# EAGLE board followLineMain (EAGLE 7.7.0)
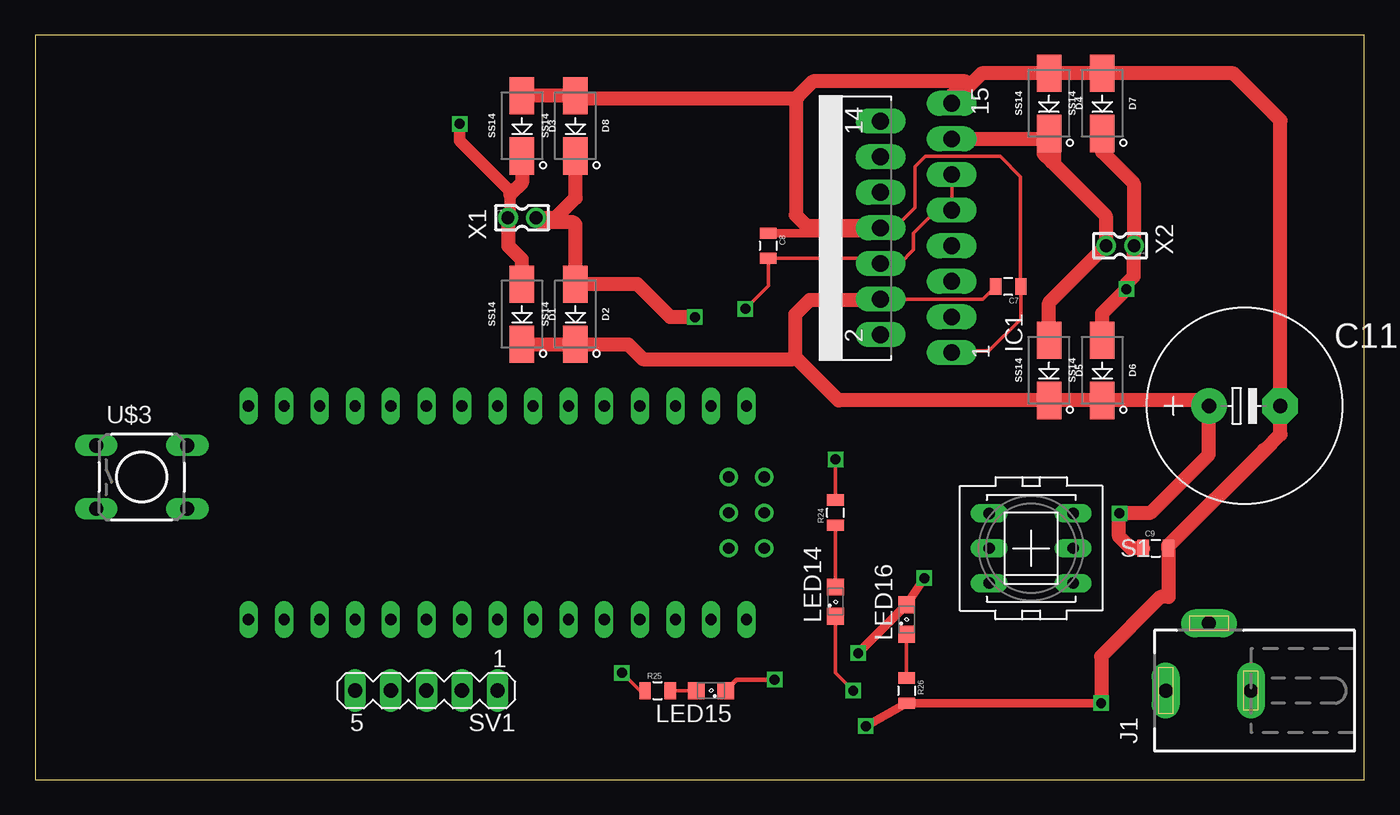
[diagram p0: board, top side]
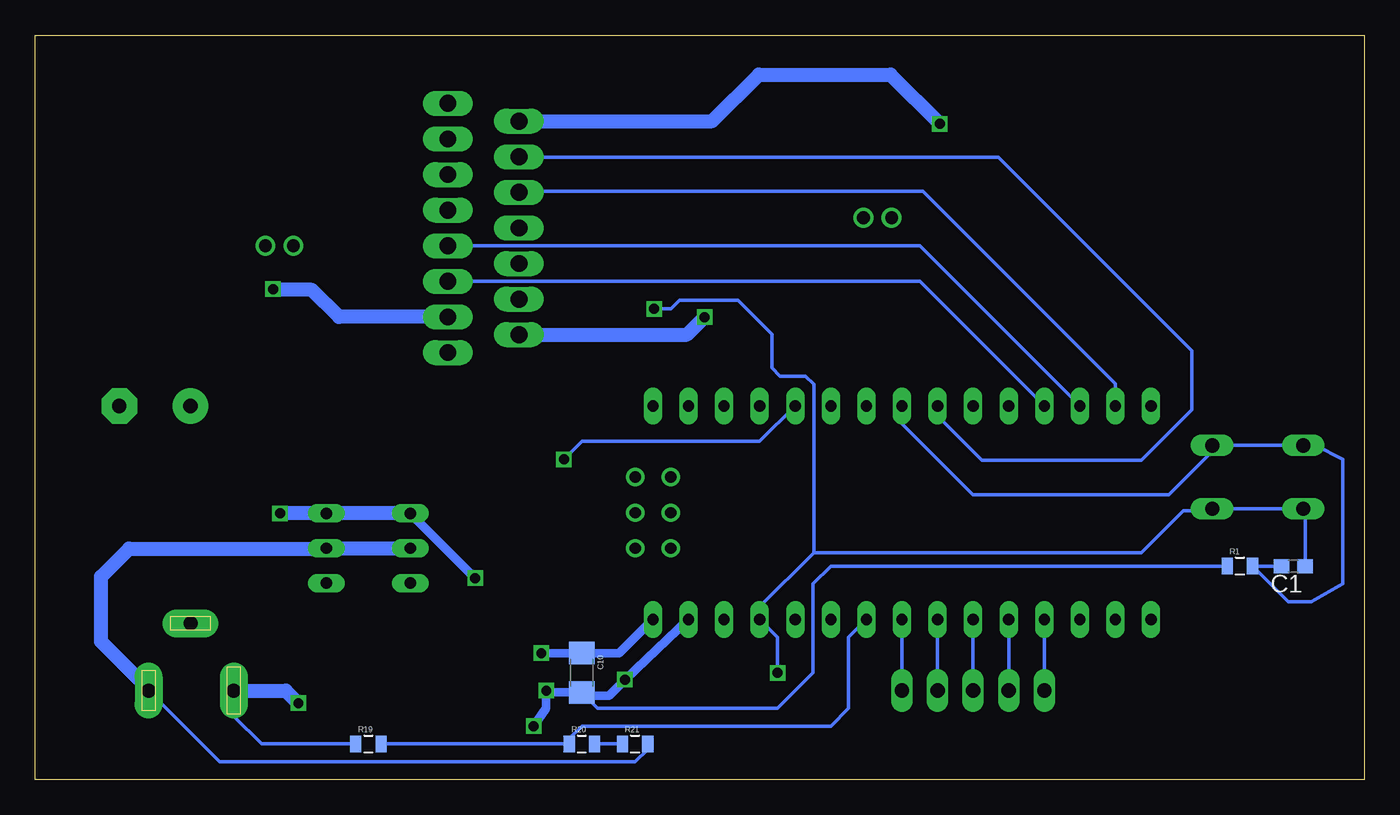
[diagram p1: board, bottom side, seen from below]

Size 94.92 x 53.14 mm. Coordinates in mm from the lower left corner, seen from the top.
Outline: 0,0 94.92,0 94.92,53.14 0,53.14 0,0
Copper layers (1*16): Top 0.035mm / dielectric 1.5mm / Bottom 0.035mm
Design rules "default": minimum track width 10mil, minimum drill 24mil, track to track 8mil, track to pad 8mil, pad to pad 8mil, via to via 8mil, smd to smd 8mil, copper to edge 40mil, drill to drill 8mil, minimum pad ring 10mil, minimum via ring 8mil, stop-mask expansion 4mil, vias tented up to drill 0mil, thermal gap 10mil

## Footprints (pad centres in the part's own frame; a part is rotated, then mirrored left to right if it is on the bottom)
C0603 = smd 1.1 x 1: 1 -0.85,0; 2 0.85,0
0805 = smd 0.8 x 1.2: 1 -0.9,0; 2 0.9,0
1206 = smd 1.6 x 1.8: 1 -1.4,0; 2 1.4,0
E5-13 = drill 1.016 pad 2.54: + -2.54,0 | drill 1.016 pad 2.54 octagon: - 2.54,0
DO214 = smd 2.65 x 1.75: ANODE -2.15,0; CATHODE 2.15,0
MULTIWATT-15 = drill 1.2 long: 1 -8.89,-7.62; 2 -7.62,-2.54; 3 -6.35,-7.62; 4 -5.08,-2.54; 5 -3.81,-7.62; 6 -2.54,-2.54; 7 -1.27,-7.62; 8 0,-2.54; 9 1.27,-7.62; 10 2.54,-2.54; 11 3.81,-7.62; 12 5.08,-2.54; 13 6.35,-7.62; 14 7.62,-2.54; 15 8.89,-7.62
DCJ0202 = drill 1 pad 2 long: 1 0,3.1; 2 4.8,0; 3 0,-3
SML0805 = smd 1.2 x 1.2: A 1.05,0; C -1.05,0
PVA2R = drill 0.813 long: 1 -2.997,2.489; 2 -2.997,0; 3 -2.997,-2.489; 4 2.997,2.489; 5 2.997,0; 6 2.997,-2.489
MA05-1 = drill 1.016 long: 1 -5.08,0; 2 -2.54,0; 3 0,0; 4 2.54,0; 5 5.08,0
NANO = drill 0.8 long: 3.3V -10.16,24.13; 5V -10.16,-1.27; A0 -10.16,19.05; A1 -10.16,16.51; A2 -10.16,13.97; A3 -10.16,11.43; A4 -10.16,8.89; A5 -10.16,6.35; A6 -10.16,3.81; A7 -10.16,1.27; AREF -10.16,21.59; D2 5.08,1.27; D3 5.08,3.81; D4 5.08,6.35; D5 5.08,8.89; D6 5.08,11.43; D7 5.08,13.97; D8 5.08,16.51; D9 5.08,19.05; D10 5.08,21.59; D11 5.08,24.13; D12 5.08,26.67; D13 -10.16,26.67; GND -10.16,-6.35; GND1 5.08,-1.27; RAW -10.16,-8.89; RST -10.16,-3.81; RST1 5.08,-3.81; RX1 5.08,-6.35; TX0 5.08,-8.89 | drill 0.8: ICSP1 -5.08,-10.16; ICSP2 -5.08,-7.62; ICSP3 -2.54,-10.16; ICSP4 -2.54,-7.62; ICSP5 0,-10.16; ICSP6 0,-7.62
TAC-SWITCH-PTH = drill 1.016 pad 1.524 long: 1 -3.251,2.261; 2 3.251,2.261; 3 -3.251,-2.261; 4 3.251,-2.261
332-02 = drill 0.9 pad 1.27: 1 0,-1; 2 0,1

## Placement (x,y rotation side)
C1  100nF  [C0603]  5.08,15.24 180 bottom
C7  100nF  [0805]  69.48,35.19 180 top
C8  100nF  [0805]  52.35,38.1 270 top
C9  100nF  [0805]  80.01,16.51 0 top
C10  1uF  [1206]  55.88,7.62 270 bottom
C11  330uF  [E5-13]  86.36,26.67 0 top
D1  SS14  [DO214]  34.77,33.21 270 top
D2  SS14  [DO214]  38.58,33.21 270 top
D3  SS14  [DO214]  34.77,46.66 270 top
D4  SS14  [DO214]  72.39,48.26 270 top
D5  SS14  [DO214]  72.39,29.21 270 top
D6  SS14  [DO214]  76.2,29.21 270 top
D7  SS14  [DO214]  76.2,48.26 270 top
D8  SS14  [DO214]  38.58,46.66 270 top
IC1  L298  [MULTIWATT-15]  57.83,39.37 90 top
J1  DCJ0202  [DCJ0202]  83.82,6.35 90 top
LED14  red  [SML0805]  57.15,12.7 90 top
LED15  green  [SML0805]  48.26,6.35 180 top
LED16  green  [SML0805]  62.23,11.43 90 top
R1  10K  [0805]  8.89,15.24 0 bottom
R19  100K  [0805]  71.12,2.54 0 bottom
R20  100K  [0805]  55.88,2.54 0 bottom
R21  100K  [0805]  52.07,2.54 0 bottom
R24  510  [0805]  57.15,19.05 90 top
R25  510  [0805]  44.45,6.35 0 top
R26  820  [0805]  62.23,6.35 270 top
S1  PVA2R  [PVA2R]  71.12,16.51 0 top
SV1  [MA05-1]  27.94,6.35 180 top
U$1  NANO  [NANO]  41.91,21.59 90 top
U$3  TACTILE-SWITCH-PTH  [TAC-SWITCH-PTH]  7.62,21.59 0 top
X1  332-02  [332-02]  34.77,40.1 270 top
X2  332-02  [332-02]  77.47,38.1 90 top

## Library data of the parts
C1 = eagle-ltspice; SPICEMODEL: NONE; SPICEPREFIX: C
C7-C10 = SparkFun-Capacitors
C11 = rcl
D1-D8 = ihpcb-diode
IC1 = st-microelectronics; MPN: L298N; OC_FARNELL: 1589425; OC_NEWARK: 32M1527
J1 = con-jack; OC_FARNELL: unknown; OC_NEWARK: unknown
LED14-LED16 = led
R1 R19-R21 R24-R26 = SparkFun-Passives
S1 = switch-misc
SV1 = con-lstb; OC_FARNELL: unknown; OC_NEWARK: unknown
U$1 = Arduino-clone
U$3 = GeekAmmo
X1 X2 = con-garry

## Nets
5V: C1.1 C8.2 IC1.6 IC1.9 IC1.11 R25.1 U$1.5V U$3.3 U$3.4
A5: R19.2 R20.1 U$1.A5
COUNT: C1.2 R1.2 U$1.D5 U$3.1 U$3.2
GND: C7.1 C8.1 C9.2 C10.2 C11.- D3.ANODE D4.ANODE D7.ANODE D8.ANODE IC1.1 IC1.8 IC1.15 J1.1 LED14.C LED15.C R1.1 R19.1 R26.2 U$1.GND
LOWBAT: R24.2 U$1.D2
N$1: LED16.C R26.1
N$2: LED14.A R24.1
N$3: SV1.1 U$1.A4
N$4: SV1.2 U$1.A3
N$5: R20.2 R21.1
N$6: SV1.3 U$1.A2
N$7: SV1.4 U$1.A1
N$8: SV1.5 U$1.A0
N$9: LED15.A R25.2
OUT1: D2.ANODE D8.CATHODE IC1.2 X1.2
OUT2: D6.ANODE D7.CATHODE IC1.3 X2.1
OUT3: D4.CATHODE D5.ANODE IC1.13 X2.2
OUT4: D1.ANODE D3.CATHODE IC1.14 X1.1
PWM1: IC1.5 U$1.D9
PWM2: IC1.7 U$1.D10
PWM3: IC1.10 U$1.D11
PWM4: IC1.12 U$1.D6
VBAT: C7.2 C9.1 C10.1 C11.+ D1.CATHODE D2.CATHODE D5.CATHODE D6.CATHODE IC1.4 LED16.A S1.1 S1.4 U$1.RAW
VIN: J1.3 R21.2 S1.2 S1.5

## Tracks (layer width: path | path; a pad name or v marks a point on that pad's centre or on a via)
5V  (via drill 0.7)
  Top 0.254: v41.91,7.62 43.18,6.35 R25.1 | IC1.11 IC1.9 65.01,40.2 63.92,40.2 62.72,39 62.72,37.8 61.75,36.83 IC1.6 60,37.2 C8.2 52.35,35.23 v50.72,33.6
  Bottom 0.254: C1.1 4.23,19.19 U$3.3 U$3.4 11,19.2 12.92,19.2 15.92,16.2 39.32,16.2 | v41.91,7.62 41.91,10.16 U$1.5V 43.18,12.34 39.32,16.2 | v50.72,33.6 49.52,33.6 48.92,34.2 44.72,34.2 42.32,31.8 42.32,29.4 41.72,28.8 39.92,28.8 39.32,28.2 39.32,16.2
A5
  Bottom 0.254: R19.2 R20.1 56.78,2.91 55.88,3.81 38.1,3.81 36.83,5.08 36.83,10.16 U$1.A5
COUNT
  Bottom 0.254: C1.2 R1.2 5.45,12.7 3.81,12.7 1.54,13.97 1.54,22.86 3.53,23.85 U$3.1 U$3.2 10.87,23.42 13.97,20.32 27.94,20.32 33.02,25.4 U$1.D5
GND  (via drill 0.7)
  Top 0.254: LED14.C 57.15,7.62 v58.42,6.35 | IC1.1 65.57,30.6 68.12,30.6 70.38,32.86 C7.1 70.36,35.21 70.36,43.04 68.92,44.48 63.56,44.48 62.82,43.74 62.82,40.8 61.39,39.37 IC1.8
  Top 0.305: v52.8,7.13 50.09,7.13 LED15.C
  Top 0.61: v59.32,3.81 R26.2 v76.12,5.45 | 49.53,6.13 LED15.C | C8.1 60.37,39 IC1.8
  Top 0.813: 54.32,48.6 54.48,48.76 55.52,49.8
  Top 1.016: v76.12,5.45 76.12,8.8 80.36,13.04 80.92,13.04 C9.2 80.91,16.71 | 54.48,48.76 55.56,49.84 66.44,49.84 65.45,48.85 IC1.15 67.6,50.41 D4.ANODE D7.ANODE 85.56,50.4 88.88,47.08 88.92,47.04 88.92,26.65 | IC1.8 60.22,39.52 55.08,39.52 54.32,40.28 54.32,48.6 38.79,48.6 D8.ANODE D3.ANODE | 80.91,16.71 87.72,23.52 87.8,23.52 | 87.8,23.52 88.92,24.64 88.92,26.65 | 88.92,26.65 C11.- | 80.91,16.71 80.99,16.71 87.8,23.52
  Bottom 0.254: J1.1 80.72,4.52 78.74,2.54 R19.1 | R1.1 38.1,15.24 39.37,13.97 39.37,7.62 41.91,5.08 54.74,5.08 C10.2
  Bottom 0.61: v59.32,3.81 58.42,5.08 v58.42,6.35 58.29,6.22 C10.2 55.66,6 53.92,6 v52.8,7.12 v52.8,7.13 U$1.GND
  Bottom 1.016: J1.1 77.02,6.35 v76.12,5.45
LOWBAT  (via drill 0.7)
  Top 0.254: R24.2 v57.15,22.86
  Bottom 0.254: v57.15,22.86 55.88,24.13 43.18,24.13 U$1.D2
N$1
  Top 0.254: LED16.C R26.1
N$2
  Top 0.254: LED14.A R24.1
N$3
  Bottom 0.254: SV1.1 U$1.A4
N$4
  Bottom 0.254: SV1.2 U$1.A3
N$5
  Bottom 0.254: R20.2 R21.1
N$6
  Bottom 0.254: SV1.3 U$1.A2
N$7
  Bottom 0.254: SV1.4 U$1.A1
N$8
  Bottom 0.254: SV1.5 U$1.A0
N$9
  Top 0.254: LED15.A R25.2
OUT1  (via drill 0.7)
  Top 1.016: v47.12,33 45.36,33 43,35.36 D2.ANODE 38.58,39.62 38.44,39.76 36.11,39.76 X1.2 37.18,40.1 38.6,41.52 38.6,44.49 D8.CATHODE
  Bottom 1.016: IC1.2 48.37,31.75 v47.12,33
OUT2  (via drill 0.7)
  Top 1.016: D6.ANODE 76.2,33.28 v77.92,35 77.92,35.4 78.44,35.92 78.44,38.07 X2.1 78.44,38.13 78.44,42.56 76.2,44.8 D7.CATHODE
  Bottom 1.016: IC1.3 73.22,33.02 75.16,34.96 77.88,34.96 v77.92,35
OUT3
  Top 0.813: 72,45.72 D4.CATHODE
  Top 1.016: D5.ANODE 72.39,34.02 X2.2 76.44,38.13 76.44,40.24 72.6,44.08 | 72,45.72 72,44.68 72.6,44.08 | IC1.13 71.76,45.72 72.76,44.72 72.76,44.24 72.6,44.08
OUT4  (via drill 0.7)
  Top 0.813: 33.92,39.95 X1.1 33.92,40.25 33.92,41.76 33.92,42 30.32,45.6 v30.32,46.8
  Top 1.016: D3.CATHODE 34.77,42.61 33.92,41.76 | D1.ANODE 34.77,37.11 33.8,38.08 33.8,40.07 X1.1
  Bottom 1.016: IC1.14 46.57,46.99 43.24,50.32 33.84,50.32 v30.32,46.8
PWM1
  Bottom 0.254: IC1.5 31.75,35.56 U$1.D9
PWM2
  Bottom 0.254: IC1.7 31.75,38.1 U$1.D10
PWM3
  Bottom 0.254: U$1.D11 17.78,28.26 31.52,42 60.28,42 IC1.10
PWM4
  Bottom 0.254: U$1.D6 30.48,25.96 27.32,22.8 15.92,22.8 12.32,26.4 12.32,30.6 26.12,44.4 60.32,44.4 IC1.12
VBAT  (via drill 0.7)
  Top 0.254: IC1.4 67.68,34.29 C7.2
  Top 0.61: v58.77,9.02 LED16.A v63.5,14.38
  Top 0.813: 77.42,18.2 v77.42,19 77.47,19.05 | D5.CATHODE 72.92,27.06 72.86,27 | 83.43,27.06 C11.+
  Top 1.016: C9.1 78.25,16.51 77.4,17.36 77.4,18.98 v77.42,19 | 77.47,19.05 79.65,19.05 83.8,23.2 83.8,26.65 C11.+ | 83.43,27.06 D6.CATHODE D5.CATHODE 57.38,27.06 54.28,30.16 | 54.28,30.16 54.28,33.2 55.32,34.24 60.32,34.24 IC1.4 | D1.CATHODE D2.CATHODE 42.34,31.06 43.4,30 54.12,30 54.28,30.16
  Bottom 0.61: U$1.RAW 53.21,9.02 C10.1 v58.77,9.02 | v63.5,14.38 S1.1
  Bottom 0.813: v77.42,19 77.47,19.05
  Bottom 1.016: S1.1 S1.4 v77.42,19
VIN
  Bottom 0.254: R21.2 51.17,2.17 52.07,1.27 81.74,1.27 J1.3
  Bottom 1.016: J1.3 86.82,6.46 90.2,9.84 90.2,14.48 88.2,16.48 74.15,16.48 S1.5 S1.2